# Altium PCB ultra.PcbDoc
Units mm, origin at the board's own origin, x right, y up, seen from the top; angles counter-clockwise.
Board outline 100 x 30 mm, 2 copper layers (Top Layer, Bottom Layer); 5 components, 6 nets, 14 pads, 0 vias.
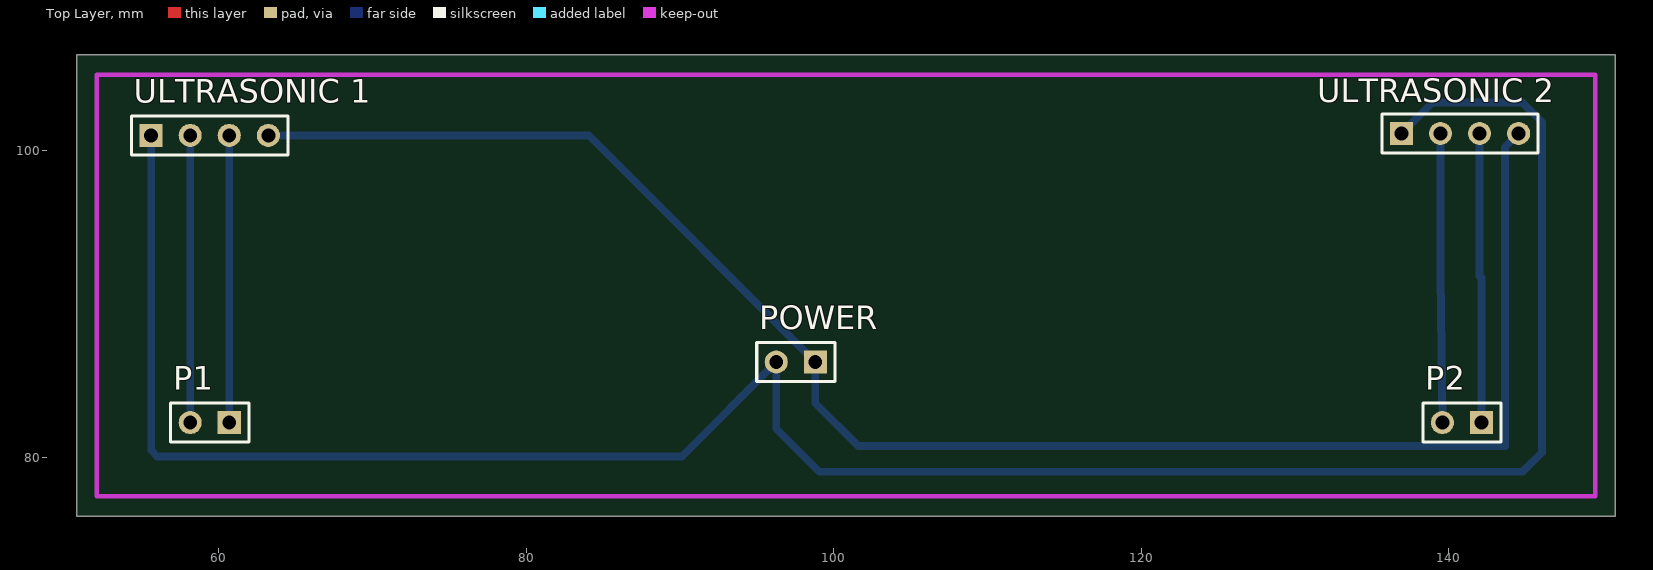
[diagram p0: Top Layer view]
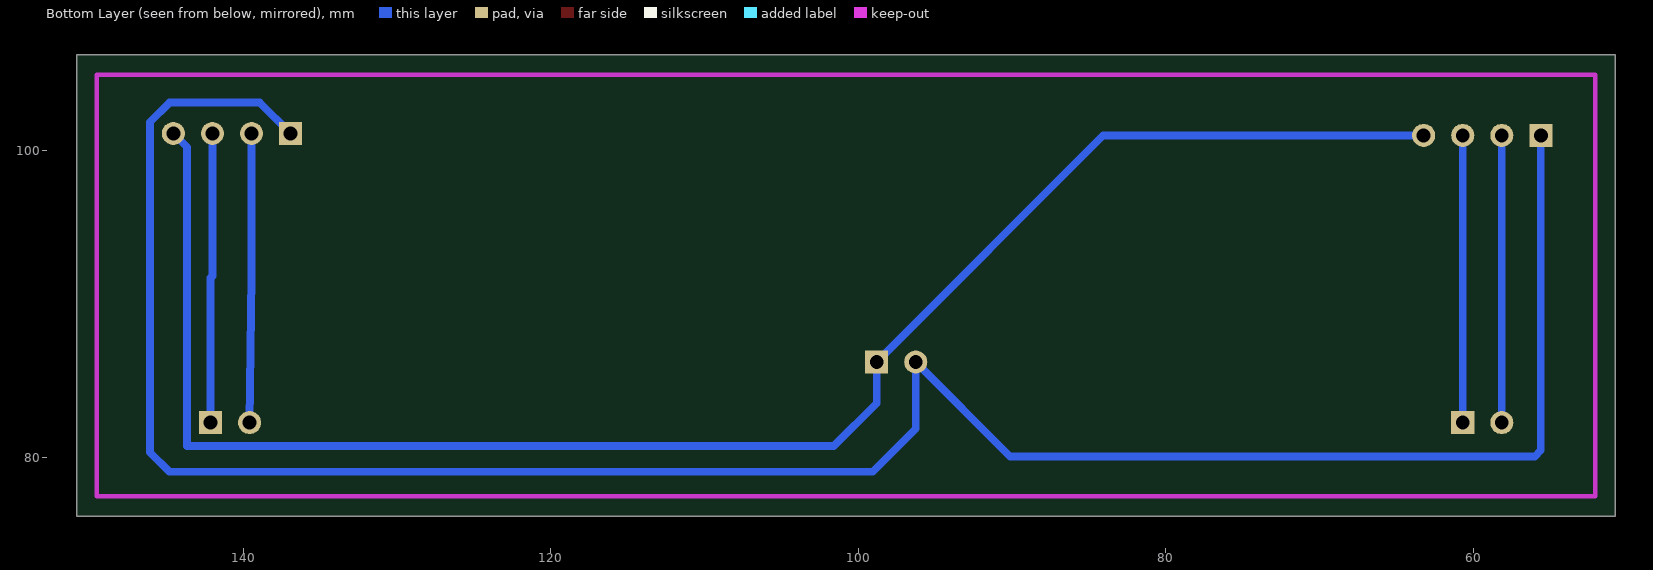
[diagram p1: Bottom Layer view, seen from below]

## Layer stack, top to bottom
Top Solder: solder mask 0.0102, Solder Resist, Dk 3.5
Top Layer: signal copper 0.0356
Dielectric 1: dielectric 0.32, FR-4, Dk 4.8
Bottom Layer: signal copper 0.0356
Bottom Solder: solder mask 0.0102, Solder Resist, Dk 3.5

## Board outline
50.8,76.2 150.8,76.2 150.8,106.2 50.8,106.2

## Design rules (kind name [scope] priority, off if disabled: settings)
Clearance [All] p1: gap=0.5
PolygonConnect [All] p1: connectstyle=Relief reliefconductorwidth=0.254 reliefentries=4 polygonreliefangle="90 Angle" airgapwidth=0.254
RoomDefinition ultrasonic [InComponentClass('ultrasonic')] p1: confinementstyle=ConfineIn formatcopy=TRUE lockcomponents=FALSE outline 152.019,77.724 206.375,77.724 206.375,90.932 152.019,90.932
RoomDefinition "AT long bus (13.3 x 4.2 inches)" [InComponentClass('AT long bus (13.3 x 4.2 inches)')] p2: confinementstyle=ConfineIn formatcopy=TRUE lockcomponents=FALSE outline 0,0 50.8,0 50.8,25.4 0,25.4
RoutingVias [All] p1: holewidth=0.6 width=1 viastyle="Through Hole" minholewidth=0.711 minwidth=1.27 maxholewidth=0.711 maxwidth=1.27
SolderMaskExpansion [All] p1: expansion=0.102
Width [All] p1: maxlimit=0.5 minlimit=0.5 preferedwidth=0.5
30 further rules are at their usual default settings.

## Classes and differential pairs
component class "AT long bus (13.3 x 4.2 inches)": P?

## Components (designator, comment, footprint, x,y, rotation, side; value= is the part's Value field where it differs from the comment)
P1 "Header 2" HDR1X2 60.706,82.296 r180 top
P2 "Header 2" HDR1X2 142.113,82.296 r180 top
POWER "Header 2" HDR1X2 98.806,86.233 r180 top
"ULTRASONIC 1" "Header 4" HDR1X4 55.626,100.965 r0 top
"ULTRASONIC 2" "Header 4" HDR1X4 136.906,101.092 r0 top

## Footprints (in the part's own frame and the unit in brackets; to place one, negate y for a bottom-side part, rotate by r counter-clockwise, add the part's x,y. Pads: shape width x height; smd on the part's side, far side on the other; paste and mask are expansions set on the pad)
HDR1X2 [mm] "Connector; Header; 2 Position"
  rect 1.5x1.5 hole 0.9: 1(0,0)
  round 1.5 hole 0.9: 2(2.54,0)
  silkscreen extent -1.27,-1.27 3.81,1.27
HDR1X4 [mm] "Connector; Header; 4 Position"
  rect 1.5x1.5 hole 0.9: 1(0,0)
  round 1.5 hole 0.9: 2(2.54,0) 3(5.08,0) 4(7.62,0)
  silkscreen extent -1.27,-1.27 8.89,1.27

## Part data
P1 P2 POWER: "Header, 2-Pin"
"ULTRASONIC 1" "ULTRASONIC 2": "Header, 4-Pin"

## Nets (pads, with @x,y where several pads share a name; then routed paths per layer and width w, separated by ;. In a path a pad name is that pad's centre, name@x,y a point inside that pad or via, vN(x,y) a via of type N, cw(c..) or ccw(c..) an arc to the next point about the centre after c; other vN are vias at no path point)
GND: "ULTRASONIC 1.4" "ULTRASONIC 2.4" POWER.1 | length 111
  Bottom Layer w0.5: 63.246,100.965 84.074,100.965 POWER.1 98.806,83.566 101.6,80.772 143.637,80.772 143.637,100.203 144.526,101.092
NetP1_1: "ULTRASONIC 1.3" P1.1 | length 18.7
  Bottom Layer w0.5: P1.1 60.706,100.965
NetP2_1: "ULTRASONIC 2.3" P2.1 | length 18.8
  Bottom Layer w0.5: 141.986,101.092 141.986,91.821 142.113,91.694 P2.1
"TRIG 1": "ULTRASONIC 1.2" P1.2 | length 18.7
  Bottom Layer w0.5: P1.2 58.166,100.965
"TRIG 2": "ULTRASONIC 2.2" P2.2 | length 18.8
  Bottom Layer w0.5: 139.446,101.092 139.446,91.821 P2.2
VCC: "ULTRASONIC 1.1" "ULTRASONIC 2.1" POWER.2 | length 151.6
  Bottom Layer w0.5: 55.626,100.965 55.626,80.493 56.032,80.086 90.119,80.086 POWER.2 96.266,81.89 99.06,79.096 144.78,79.096 146.05,80.366 146.05,101.829 144.78,103.099 138.913,103.099 136.906,101.092

## Keep-outs
Keep-Out Layer:
  lines w0.3: 52.1,77.5 149.5,77.5 149.5,104.9 52.1,104.9 52.1,77.5

## Silkscreen, mask and mechanical layers (free items; w line width, h text height)
Drill Drawing:
  text ".LEGEND" at 155.88,81.28 h1.52
  text "Drill Drawing." at 155.88,78.74 h1.52

## Dimensions
52.1,77.5 to 149.5,77.5 on Mechanical 1
52.1,77.5 to 52.1,104.9 on Mechanical 1